# Altium PCB NanoPiAir_Shield_V1.PcbDoc (part 2 of 2)
Units mm, origin at the board's own origin, x right, y up, seen from the top; angles counter-clockwise.
Board outline 40 x 40 mm, 4 copper layers (Top Copper, Signal Layer 1, Signal Layer 2, Bottom Copper), stack 1.57 mm thick; 74 components, 57 nets, 352 pads, 255 vias.
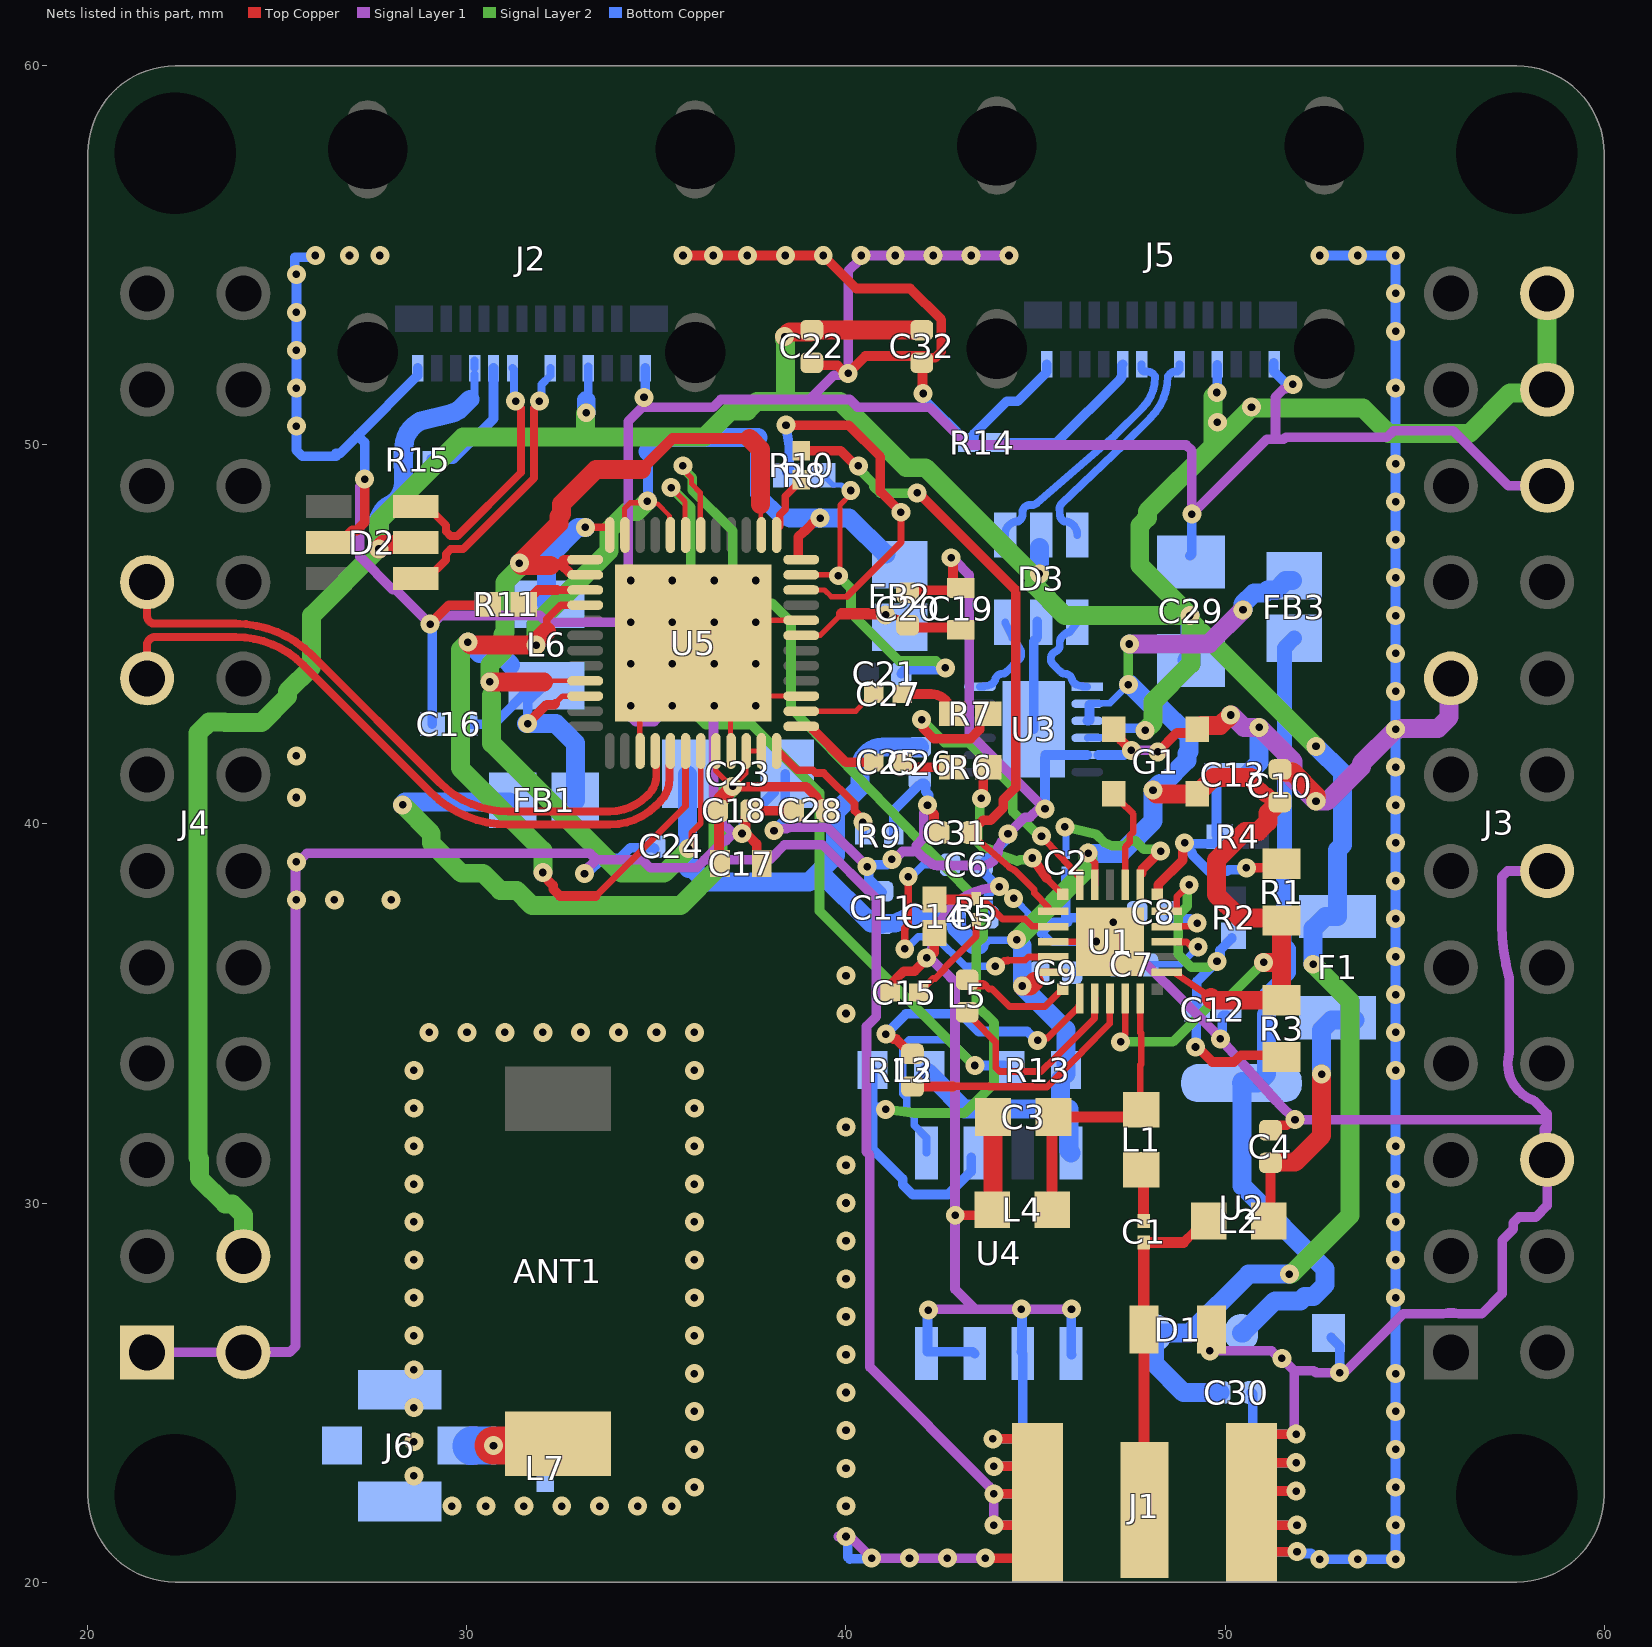
[diagram p4: the nets of this part, all layers, seen from the top]

## Via types
v1: diameter 0.5, hole 0.2, Top Copper to Bottom Copper, tented both sides, 239 vias
v2: diameter 0.5, hole 0.2, Top Copper to Bottom Copper, 16 vias

## Nets (pads, with @x,y where several pads share a name; then routed paths per layer and width w, separated by ;. In a path a pad name is that pad's centre, name@x,y a point inside that pad or via, vN(x,y) a via of type N, cw(c..) or ccw(c..) an arc to the next point about the centre after c; other vN are vias at no path point) (continued)
GND: C2.2 C3.1 C4.1 C5.1 C6.1 C7.1 C8.1 C9.2 C10.1 C11.2 C12.1 C13.2 C14.1 C15.2 C16.1 C17.1 C18.1 C19.1 C20.1 C22.1 C23.1 C24.1 C26.2 C28.2 C29.1 C30.1 C31.1 C32.1 D1.2 D2.2 D3.2 G1.1 G1.2 J1.2_1 J1.2_2 J1.3_1 J1.3_2 J2.A1 J2.A12 J3.6 J3.12 J3.15 J3.20 J4.1 J4.2 J5.A1 J5.A12 J6.2 J6.3 J6.4 L4.1 L7.1 R9.1 R11.2 R14.2 U1.16 U1.25 U2.1 U3.5 U3.13 U4.1 U4.2 U4.3 U4.4 U5.3 U5.8 U5.39 U5.45 U5.49 | length 364
  Top Copper w0.12: U5.49@34.55,42.8 U5.49@34.554,42.8
  Top Copper w0.14: U5.39@34.554,41.925 U5.49@34.554,42.8 ; U5.45@36.954,41.925 36.954,42.779 U5.49@36.975,42.8 ; U5.49@37.6,43.15 37.825,43.375 U5.3@38.804,43.375 ; U5.49@37.604,45.325 37.652,45.373 U5.8@38.825,45.373
  Top Copper w0.18: U1.16@45.466,36.894 U1.25@46.606,36.894 ; v1(46.6,36.9) U1.25@46.606,36.894 ; U1.25@46.966,36.894 U1.25@46.606,36.894
  Top Copper w0.254: D2.2@26.35,47.425 26.65,47.425 26.97,47.745 27.087,47.745 27.3,47.958 v1(27.3,49.1) ; v1(29.025,45.275) 29.525,45.775 R11.2@30.525,45.775 ; U5.49@34.304,43.125 U5.49@34.55,42.879 ; v1(35.7,55) v1(36.5,55) v1(37.4,55) v1(38.4,55) v1(39.4,55) 40.271,54.129 41.692,54.129 42.516,53.306 42.516,52.462 42.357,52.303 42.133,52.303 C32.1@42,52.17 ; U5.49@36.504,43.125 36.657,43.125 U5.49@36.95,42.832 ; C18.1@37.469,40.3 37.347,40.178 37.347,39.908 37.255,39.817 v1(37.255,39.75) 37.302,39.703 37.417,39.703 37.642,39.478 37.642,39.058 C17.1@37.7,39 ; C18.1@37.483,40.353 38.597,40.353 C28.2@38.6,40.35 ; C22.1@39.091,52.121 39.111,52.1 39.781,52.1 39.989,51.892 v1(40.056,51.892) 40.51,52.347 C32.1@42.108,52.347 ; C15.2@41.125,35.7 41.325,35.9 41.325,35.916 41.525,36.116 41.809,36.116 42.13,36.437 v1(42.13,36.466) ; C20.1@41.625,46.105 41.685,46.165 C19.1@42.94,46.165 ; C32.1@41.986,52.121 42.019,52.088 42.019,51.377 v1(42.037,51.359) ; v1(42.15,40.5) 42.15,40.433 42.323,40.26 42.323,39.877 C31.1@42.425,39.775 ; v1@42.325,36.605 C14.1@42.325,37.075 ; v1(42.775,47.025) 42.822,46.978 42.822,46.358 42.88,46.3 C19.1@42.95,46.3 ; v1(42.883,29.676) 43.712,29.676 L4.1@43.86,29.825 ; v1(43.675,20.629) 44.629,20.629 J1.2_1@44.7,20.7 ; v1(43.875,23.775) 44.7,23.775 J1.2_1@44.725,23.8 ; v1(43.9,21.5) 44.575,21.5 J1.2_1@44.65,21.575 ; v1(43.9,22.325) J1.2_1@44.55,22.325 ; v1(43.9,23.05) J1.2_1@44.55,23.05 ; G1.2@47.067,42.497 47.25,42.314 47.25,42.213 47.522,41.941 v1(47.529,41.941) ; v1(48.225,41.902) 48.725,42.402 49.172,42.402 G1.1@49.267,42.497 ; v1(49.6,26.1) 49.6,26.485 D1.2@49.67,26.555 ; J1.3_1@51.125,22.375 51.15,22.4 v1(51.875,22.4) ; J1.3_1@51.125,23.125 51.15,23.15 v1(51.875,23.15) ; J1.3_1@51.125,23.875 51.15,23.9 v1(51.875,23.9) ; J1.3_1@51.175,20.85 51.225,20.8 v1(51.9,20.8) ; J1.3_1@51.2,21.5 v1(51.9,21.5) ; C4.1@51.225,31.878 51.225,31.906 51.372,32.052 51.633,32.052 ; v1@53.469,20.535 v1@53.5,20.504
  Top Copper w0.5: L4.1@43.875,29.875 C3.1@43.875,32.264 ; G1.1@49.375,42.6 49.875,42.6 v1(50.15,42.875) ; C10.1@51.525,41.375 51.781,41.375 52.4,40.756 v1(52.4,40.6)
  Signal Layer 1 w0.254: J4.1@21.825,26.1 21.865,26.06 J4.2@24.1,26.06 ; J4.2@24.109,26.069 25.326,26.069 25.475,26.218 v1@25.475,39 ; v1(25.5,39) 25.547,39 25.772,39.225 33.251,39.225 33.4,39.076 33.4,39.055 ; v1@27.275,49.1 27.275,49.008 27.173,48.906 27.173,47.052 28.038,46.187 28.113,46.187 v1@29.012,45.288 ; v1@29.025,45.3 29.117,45.3 29.317,45.5 31.921,45.5 32.096,45.325 v2@34.3,45.325 ; v1(33.1,38.689) 33.1,38.755 33.4,39.055 ; v2@34.3,43.1 34.351,43.049 34.351,42.797 34.449,42.7 34.937,42.7 35.362,43.125 35.404,43.125 v2@35.404,44.196 ; v2@34.304,44.404 34.304,46.425 34.257,46.472 34.257,50.631 34.63,51.003 ; v2@34.4,45.325 v2@35.4,45.325 ; 34.646,51.003 34.63,51.003 ; 34.671,51 36.5,51 36.7,51.2 39.04,51.2 ; v1(34.671,51.257) 34.671,51.044 34.63,51.003 ; v2@35.404,44.225 35.404,46.311 v2@35.493,46.4 ; v2@35.45,45.325 v2@36.504,45.325 ; v2@36.504,43.125 36.504,40.271 v1@37.025,39.75 ; v2@36.504,45.354 36.504,46.425 v2@37.6,46.425 ; v1(37.255,39.75) v1@37.025,39.75 ; v2@37.575,44.225 36.504,44.225 v2@36.504,45.325 ; v2@37.6,45.325 v2@36.504,45.325 ; v2@37.604,43.125 v2@37.604,44.196 ; v1(38.1,39.825) 38.147,39.872 38.438,39.872 38.477,39.912 39.513,39.912 40.55,38.875 v1(40.557,38.875) ; v1@39.8,21.2 v1(40,21.2) 40.104,21.2 v1(40.675,20.629) v1(41.675,20.629) ; v1@40.367,54.9 40.056,54.589 v1(40.056,51.892) 40.009,51.845 39.685,51.845 39.04,51.2 ; v1(40.4,55) v1(41.3,55) v1(42.3,55) v1@43.2,55 ; v1(41.212,39.065) 41.279,39.065 41.488,39.275 41.775,39.275 ; v1@41.729,20.629 v1(42.675,20.629) ; 41.856,39.292 42.005,39.143 42.222,38.986 ccw(c42.409,39.158) 42.408,38.904 43.579,38.904 ccw(c43.579,39.35) 44.025,39.35 cw(c44.025,39.375) 44,39.375 44.055,39.439 44.096,39.53 ; 41.859,39.434 42.05,39.625 42.05,40.301 42.103,40.354 42.103,40.453 v1(42.15,40.5) ; v1(42.13,36.466) 42.187,36.466 42.197,36.477 42.4,37.225 cw(c44.025,36.575) v1@44.025,38.325 ; v1(42.175,27.175) 42.2,27.2 43.4,27.2 ; v1@42.226,36.45 42.532,36.144 42.566,36.144 42.875,35.834 42.875,35.075 ; v1@42.771,20.629 v1(43.675,20.629) ; v1(42.775,47.025) 42.85,46.95 42.875,46.95 43.25,46.575 43.25,42.4 v1@45.148,40.502 ; v1@42.875,29.668 42.875,27.725 43.4,27.2 ; v1@42.875,29.7 42.875,35.067 ; 43.2,50 42.2,51 40.3,51 40.1,51.2 39.04,51.2 ; 43.233,50 48.976,50 49.125,49.851 v1(49.125,48.175) 51.103,50.153 51.333,50.153 ; v1(43.3,55) v1@44.2,55 ; v1(43.9,21.5) v1(43.9,22.325) 43.9,22.4 43.892,22.4 43.777,22.515 43.777,22.523 40.631,25.669 40.631,31.261 40.543,31.35 40.543,34.662 40.8,34.919 40.8,38.025 39.373,39.452 38.377,39.452 37.98,39.055 36.268,39.055 ; v1(44.275,39.738) 44.279,39.738 44.723,40.181 44.855,40.181 v1@45.103,40.429 ; v1(45.95,27.2) v1(44.625,27.2) 43.4,27.2 ; v1(47.056,37.411) 47.103,37.364 47.103,37.122 v1@49.719,34.506 ; v1(47.529,41.941) 47.533,41.946 48.181,41.946 v1(48.225,41.902) ; v1(49.6,26.1) 51.233,26.1 51.433,25.9 v1(51.5,25.9) 51.825,25.575 ; v1(49.878,34.329) 51.355,32.692 51.429,32.618 v1(51.847,32.2) ; v1(51.791,51.602) 51.724,51.602 51.608,51.486 51.558,51.486 51.333,51.261 51.333,50.153 ; v1(51.875,23.9) 51.828,23.947 51.828,24.097 51.825,24.1 51.825,25.575 ; v1@51.9,32.2 58.5,32.2 ; J3.6@58.425,31.215 58.425,31.954 ; J3.6@58.5,31.14 58.5,29.929 58.203,29.632 57.758,29.632 57.609,29.483 57.609,29.309 57.313,29.013 57.313,27.613 56.774,27.074 56.211,27.074 cw(c56.213,27.328) 56.168,27.078 56.166,27.079 ccw(c55.96,26.06) 55.755,27.079 cw(c55.707,27.328) 55.708,27.074 54.699,27.074 53.15,25.525 v1(53.025,25.525) 52.393,25.525 52.343,25.575 51.825,25.575 ; 58.5,31.954 58.5,32.2 ; J3.12@58.5,38.76 57.454,38.76 57.305,38.611 57.305,37.34 ccw(c62.445,37.34) 57.5,35.936 57.5,33.964 ccw(c58.5,33.68) 57.5,33.396 ccw(c57.75,33.44) 57.514,33.347 57.534,33.296 ccw(c58.5,33.68) 58.15,32.701 58.5,32.351 58.5,32.2 ; J3.20@58.5,48.92 57.48,48.92 56.025,50.375 54.443,50.375 54.268,50.2 51.6,50.2 51.553,50.153 51.333,50.153 ; 33.4,39.055 34.625,39.055 34.834,38.846 36.059,38.846 36.268,39.055 ; 36.268,39.055 36.776,39.563 36.838,39.563 v1@37.025,39.75
  Signal Layer 1 w0.5: v1(50.15,42.875) 50.175,42.875 50.5,42.55 v1(50.9,42.55) 51.8,41.65 51.8,41.2 v1(52.4,40.6) 52.693,40.6 53.596,41.504 53.596,41.596 v1(54.5,42.5) 54.62,42.5 54.645,42.525 55.621,42.525 55.914,42.818 55.914,43.794 J3.15@55.96,43.84
  Bottom Copper w0.18: v1@44.375,37.95 44.511,37.95 44.803,37.658 44.803,37.522 45.175,37.15 45.45,36.875 46.575,36.875 v1(46.6,36.9) 46.6,36.851 47.125,36.326 C7.1@47.125,36.275 ; C9.2@45.965,36.075 46.904,36.075 C7.1@47.05,36.221
  Bottom Copper w0.254: v1@25.5,50.494 25.5,49.858 25.65,49.708 26.543,49.708 ; v1(25.5,50.5) v1@25.5,51.487 ; v1(25.5,51.5) v1@25.5,52.453 ; v1(25.5,52.5) v1@25.5,53.491 ; v1(25.5,53.5) v1@25.5,54.485 ; v1(25.5,54.5) 25.453,54.547 25.453,54.944 25.462,54.953 25.921,54.953 v1@25.984,55.016 ; 26.543,49.784 26.616,49.784 26.635,49.765 27.119,50.249 ; v1(27.3,49.1) 27.3,50.068 27.119,50.249 ; J2.A1@28.7,52.03 28.7,51.83 27.119,50.249 ; v1(29.025,45.275) 29.088,45.212 C16.1@29.088,42.632 ; v1(33.1,38.689) 33.167,38.689 33.573,39.095 34.03,39.095 34.313,39.378 34.922,39.378 C24.1@34.95,39.35 ; v1(34.671,51.257) 34.7,51.286 J2.A12@34.7,52.03 ; v1(37.255,39.75) 37.297,39.792 37.297,40.029 38.1,40.832 C23.1@38.1,40.85 ; v1(38.1,39.825) 38.394,40.119 C23.1@38.394,41.326 ; v1(40,21.2) 40.047,21.153 40.047,20.653 40.1,20.6 40.115,20.615 40.685,20.615 v1@40.7,20.6 ; v1@40.568,38.875 40.615,38.922 41.081,38.922 41.212,39.054 v1(41.212,39.065) ; v1@40.604,38.828 40.604,38.546 C11.2@40.95,38.2 ; R9.1@41.257,39.696 41.257,40.357 C26.2@41.925,41.025 ; C26.2@42,41.075 42.062,41.075 42.108,41.028 42.108,40.847 42.183,40.773 42.183,40.533 v1(42.15,40.5) ; v1(42.037,51.359) 42.037,51.224 43.2,50.061 R14.2@43.225,50.061 ; U4.4@42.15,26.075 43.344,26.075 U4.3@43.394,26.025 ; U4.4@42.15,26.1 42.15,27.15 v1(42.175,27.175) ; R14.2@43.278,50.089 43.373,50.184 43.373,50.289 44.238,51.154 44.524,51.154 45.3,51.93 J5.A1@45.3,52.13 ; C6.1@43.65,38.9 43.65,38.7 v1@44.002,38.348 ; C6.1@43.65,39 44.228,39.578 44.228,39.691 v1(44.275,39.738) ; C5.1@43.75,37.55 43.75,38.05 cw(c44.025,38.05) v1@44.025,38.325 ; v1(43.875,23.775) 44.502,23.775 J1.2_2@44.55,23.727 ; v1(43.9,21.5) 44.55,21.5 J1.2_2@44.575,21.475 ; v1(43.9,22.325) J1.2_2@44.375,22.325 ; v1(43.9,23.05) J1.2_2@44.475,23.05 ; U4.2@44.625,26.075 44.645,26.095 44.645,27.18 v1(44.625,27.2) ; J1.2_2@44.664,23.7 U4.2@44.664,26.025 ; U3.13@44.95,42.496 44.95,44.825 45.05,44.925 D3.2@45.05,45.35 ; 45.15,37.125 45.175,37.15 45.436,37.411 45.85,37.411 ; v1(45.25,40.4) U3.13@45.25,41.75 ; U3.13@45.254,41.821 U3.5@46.366,41.821 ; 45.801,38.7 45.801,37.574 45.85,37.525 46.775,37.525 v1@46.842,37.458 ; U4.1@45.95,26 45.942,26.008 45.942,27.192 v1(45.95,27.2) ; U3.5@46.658,41.821 47.341,41.821 47.462,41.941 v1(47.529,41.941) ; v1@47.215,37.503 47.553,37.503 C8.1@47.675,37.625 ; C29.1@49.075,47.075 49.125,47.125 v1(49.125,48.175) ; v1@49.925,34.376 v1(49.878,34.329) 49.878,34.395 49.93,34.448 49.93,34.921 49.959,34.95 C12.1@50.05,34.95 ; J1.3_2@50.65,23.302 J1.3_2@50.73,23.382 ; J1.3_2@50.7,22.1 50.73,22.13 J1.3_2@50.73,23.382 ; C30.1@50.7,25 50.73,24.97 J1.3_2@50.73,23.382 ; J1.3_2@51.075,20.975 51.075,20.973 51.248,20.8 v1(51.9,20.8) 51.947,20.753 52.281,20.753 52.433,20.6 v1(52.5,20.6) 52.502,20.602 v1@53.498,20.602 ; J1.3_2@51.1,23.2 51.15,23.15 v1(51.875,23.15) ; J1.3_2@51.125,22.4 v1(51.875,22.4) ; J1.3_2@51.15,21.675 51.15,21.598 51.248,21.5 v1(51.9,21.5) ; J5.A12@51.283,52.172 51.283,51.947 51.581,51.649 51.744,51.649 v1(51.791,51.602) ; v1(51.875,23.9) 51.248,23.9 J1.3_2@50.73,23.382 ; v1(52.5,55) v1(53.5,55) v1(54.5,55) v1(54.5,54) v1(54.5,53) v1(54.5,51.5) v1(54.5,49.5) v1(54.5,48.5) v1(54.5,47.5) v1(54.5,46.5) v1(54.5,45.5) ; U2.1@52.8,26.45 53.025,26.225 v1(53.025,25.525) ; v1(53.5,20.604) 53.502,20.602 54.498,20.602 v1(54.5,20.6) v1(54.5,21.5) v1(54.5,22.5) v1(54.5,23.5) v1(54.5,24.5) v1(54.5,25.5) v1(54.5,27.5) v1(54.5,28.5) v1(54.5,29.5) v1(54.5,30.5) v1(54.5,31.5) v1(54.5,33.5) v1(54.5,34.5) v1(54.5,35.5) v1(54.5,36.5) v1@54.5,37.4 ; v1(54.5,37.5) v1(54.5,38.5) v1(54.5,39.5) v1(54.5,40.5) v1(54.5,41.5) v1(54.5,42.5) v1(54.5,43.5) v1(54.5,44.5) v1@54.5,45.4
  Bottom Copper w0.5: C13.2@50.6,41.325 50.68,41.325 50.711,41.356 50.711,41.436 50.9,41.625 v1(50.9,42.55)
  other v1: 29.6,22 30.5,22 31.5,22 32.5,22 33.5,22 34.5,22 35.4,22 40,22 36,22.5 28.6,22.8 40,23 36,23.5 28.6,23.7 40,24 36,24.5 28.6,24.6 40,25 36,25.5 28.6,25.6 40,26 28.6,26.5 36,26.5 40,27 28.6,27.5 36,27.5 40,28 28.6,28.5 36,28.5 40,29 28.6,29.5 36,29.5 40,30 28.6,30.5 36,30.5 40,31 28.6,31.5 36,31.5 40,32 28.6,32.5 36,32.5 28.6,33.5 36,33.5 29,34.5 30,34.5 31,34.5 32,34.5 33,34.5 34,34.5 35,34.5 36,34.5 40,35 40,36 25.5,38 26.5,38 28,38 44.425,38.036 44.045,38.348 25.5,40.7 25.5,41.8 26,55 26.9,55 27.7,55 44.3,55
  other v2: 34.319,43.125 35.419,43.125 36.519,43.125 37.619,43.125 34.319,44.225 35.419,44.225 36.519,44.225 37.619,44.225 34.319,45.325 35.419,45.325 36.519,45.325 37.619,45.325 34.319,46.425 35.419,46.425 36.519,46.425 37.619,46.425
IF_AGC: C31.2 R10.2 U1.14 | length 17.1
  Top Copper w0.18: C31.2@43.45,39.603 44.304,38.864 ccw(c44.421,39.001) 44.34,38.841 44.414,38.803 cw(c44.333,38.642) 44.46,38.77 44.968,38.261 44.968,38.176 45.335,37.81
  Top Copper w0.254: R10.2@38.875,49.767 38.875,49.791 38.928,49.844 39.864,49.844 40.258,49.45 v1(40.325,49.45) ; v1(41.875,48.738) 41.912,48.738 44.475,46.175 44.475,40.964 44.153,40.642 44.153,40.437 43.813,40.097 43.608,40.097 43.316,39.805 C31.2@43.316,39.775 ; C31.2@43.303,39.75 43.443,39.61 C31.2@43.45,39.603
  Signal Layer 2 w0.254: v1(40.325,49.45) 40.325,49.383 40.731,48.977 40.731,48.906 40.909,48.729 41.866,48.729 v1(41.875,48.738)
IF_N: R7.1 U1.12 | length 9
  Top Copper w0.18: v1(45.159,39.681) 46.166,38.598 U1.12@46.166,38.394
  Top Copper w0.254: v1(41.996,42.753) 42.043,42.706 42.043,42.518 42.313,42.249 43.286,42.249 43.527,42.489 43.527,42.706 43.72,42.9 R7.1@43.775,42.9
  Signal Layer 2 w0.254: v1(41.996,42.753) 42.599,42.15 43.225,42.15 44.4,40.975 44.4,40.325 44.638,40.087 44.686,40.087 45.093,39.681 v1(45.159,39.681)
IF_P: R6.1 U1.13 | length 5.1
  Top Copper w0.18: 45.275,38.55 45.309,38.55 U1.13@45.716,38.144
  Top Copper w0.254: v1(43.573,40.677) 43.62,40.724 43.62,41.302 43.547,41.302 43.72,41.475 R6.1@43.775,41.475 ; v1(44.915,39.103) 45.292,38.567
  Signal Layer 2 w0.254: v1(43.573,40.677) 43.526,40.63 43.526,40.055 43.475,40.004 43.475,39.52 43.59,39.405 43.922,39.287 43.953,39.222 44.519,39.02 44.585,39.052 44.59,39.056 44.868,39.056 v1(44.915,39.103)
NetANT1_1: ANT1.1 J6.1 L7.2 | length 3.2
  Top Copper w1: v1(30.7,23.6) ANT1.1@32.1,23.6
  Bottom Copper w0.2: v1(30.7,23.6) 31.8,23.6 L7.2@31.9,23.5
  Bottom Copper w1: J6.1@30.112,23.588 30.125,23.6 v1(30.7,23.6)
NetC1_2: C1.2 L1.1 | length 1.4
  Top Copper w0.254: L1.1@47.789,30.88 L1.1@47.85,30.819
  Top Copper w0.293: C1.2@47.85,29.525 L1.1@47.85,30.819
NetC2_1: C2.1 U1.8 | length 4.3
  Top Copper w0.254: U1.8@47.8,38.7 47.8,38.781 v1(48.302,39.283)
  Signal Layer 2 w0.254: v1(45.775,39.925) 46.599,39.733 46.828,39.505 47.013,39.425 47.342,39.425 47.467,39.55 47.644,39.55 47.864,39.33 48.255,39.33 v1(48.302,39.283)
  Bottom Copper w0.18: C2.1@45.801,39.225 v1@45.801,39.899
NetC3_2: C3.2 L1.2 L4.2 U1.24 | length 7.8
  Top Copper w0.18: L1.2@47.766,32.484 47.766,33.645 47.792,33.671 47.792,34.477 47.766,34.502 U1.24@47.766,35.394
  Top Copper w0.254: C3.2@45.44,32.229 C3.2@45.475,32.264 ; L1.2@47.593,32.264 L1.2@47.789,32.46 L1.2@47.766,32.484
  Top Copper w0.293: L4.2@45.44,29.825 C3.2@45.44,32.229 ; C3.2@45.475,32.264 L1.2@47.593,32.264
NetC4_2: C4.2 F1.2 L2.1 | length 6.9
  Top Copper w0.254: L2.1@51.126,29.6 51.2,29.673 C4.2@51.2,31.059
  Top Copper w0.5: C4.2@51.2,31.059 51.22,31.079 51.853,31.079 52.55,31.776 v1(52.55,33.4)
  Bottom Copper w0.5: v1(52.55,33.4) 52.55,34.57 52.805,34.825 F1.2@53.425,34.825
NetC6_2: C6.2 U1.17 | length 7.4
  Top Copper w0.18: 44.27,36.407 44.725,36.407 44.812,36.494 U1.17@45.169,36.494
  Top Copper w0.2: v1(41.549,36.704) 41.55,37.254 41.643,37.347 v1(41.643,38.61) ; v1(43.939,36.247) 44.02,36.247 44.17,36.397 44.26,36.397 44.27,36.407
  Bottom Copper w0.2: v1(41.549,36.704) 41.585,36.704 41.911,37.03 42.361,37.03 43.145,36.247 v1(43.939,36.247) ; v1(41.643,38.61) 41.724,38.61 42.039,38.925 42.725,38.925 C6.2@42.75,38.95
NetC7_2: C7.2 U1.4 | length 2.1
  Top Copper w0.18: U1.4@48.725,36.9 48.738,36.887 48.987,36.887 49.057,36.817 49.228,36.817 v1(49.289,36.756)
  Bottom Copper w0.18: C7.2@48.025,36.3 48.833,36.3 v1(49.289,36.756)
NetC8_2: C8.2 U1.5 | length 1.7
  Top Copper w0.18: U1.5@48.466,37.294 48.473,37.3 49.098,37.3 49.18,37.383 v1(49.267,37.383)
  Bottom Copper w0.254: C8.2@48.525,37.66 48.682,37.503 49.079,37.503 49.2,37.383 v1(49.267,37.383)
NetC14_2: C14.2 R5.2 U1.15 | length 3.3
  Top Copper w0.18: R5.2@43.525,37.975 43.557,37.943 43.683,37.943 44.133,37.493 44.725,37.493 44.918,37.3 45.459,37.3 U1.15@45.466,37.294
  Top Copper w0.254: C14.2@42.332,38.007 R5.2@43.407,38.007
NetC15_1: C15.1 R5.1 | length 2.5
  Top Copper w0.18: C15.1@41.92,35.55 41.941,35.55 42.087,35.696 42.087,35.718 42.293,35.923 42.355,35.923 42.603,36.172 42.603,36.201 43.433,37.03 43.433,37.39 43.425,37.398 R5.1@43.425,37.4
NetC21_1: C21.1 R8.2 U5.11 | length 9.2
  Top Copper w0.14: U5.11@39.25,46.575 39.775,46.575 v1(39.8,46.55) 39.839,46.589 39.839,48.414 40.125,48.7 v1(40.125,48.8)
  Signal Layer 2 w0.254: v1(39.8,46.55) 40.132,46.218 40.132,45.568 41.398,44.301 42.373,44.301 42.555,44.12 v1(42.621,44.12)
  Bottom Copper w0.14: R8.2@39.5,49.15 39.5,49.101 39.656,48.945 39.883,48.945 40.028,48.8 v1(40.125,48.8)
  Bottom Copper w0.254: C21.1@41.455,43.965 41.563,44.073 42.574,44.073 v1(42.621,44.12)
NetC25_1: C25.1 R6.2 | length 1.3
  Top Copper w0.254: C25.1@41.475,41.55 41.585,41.55 41.635,41.5 R6.2@42.8,41.5
NetC25_2: C25.2 U5.1 | length 2
  Top Copper w0.254: U5.1@39.125,42.5 39.999,41.626 C25.2@40.73,41.626
NetC27_1: C27.1 R7.2 | length 4.1
  Top Copper w0.254: C27.1@41.488,43.43 42.245,43.43 ; 42.245,43.43 cw(c42.245,42.9) R7.2@42.775,42.9 ; 42.245,43.43 cw(c42.245,42.9) R7.2@42.775,42.9 ; 42.245,43.43 cw(c42.245,42.9) R7.2@42.775,42.9 ; 42.245,43.43 cw(c42.245,42.9) R7.2@42.775,42.9
NetC27_2: C27.2 U5.2 | length 2.1
  Top Copper w0.14: U5.2@38.85,42.975 40.254,42.975 40.709,43.43 C27.2@40.73,43.43
NetFB3_2: FB3.2 U2.2 U2.4 | length 21.7
  Bottom Copper w0.4: 51.1,34.968 51.1,35.508 51.672,36.079 51.672,36.699 51.551,36.82 51.551,39.156 51.567,39.173 51.567,44.642 FB3.2@51.825,44.899
  Bottom Copper w0.5: U2.2@50.436,26.574 50.47,26.574 51.315,27.418 51.991,27.418 52.102,27.529 52.329,27.529 52.643,27.843 52.643,28.257 50.45,30.45 U2.4@50.45,33.2 ; U2.4@50.436,33.164 50.862,33.164 51.1,33.402 51.1,34.968
NetG1_3: G1.3 U1.9 | length 2.5
  Top Copper w0.18: G1.3@47.214,40.625 47.58,40.26 47.58,39.784 47.486,39.69 47.486,39.509 47.366,39.388 U1.9@47.366,38.394
NetJ2_A5: J2.A5 R15.2 | length 3.4
  Bottom Copper w0.254: R15.2@29.058,49.632 29.642,49.632 30.7,50.69 J2.A5@30.7,52.03
NetJ5_A5: J5.A5 R14.1 | length 4.3
  Bottom Copper w0.254: R14.1@44.044,50.038 44.066,50.061 45.557,50.061 47.242,51.745 47.242,51.758 47.277,51.794 47.277,52.107 J5.A5@47.3,52.13
NetL3_1: L3.1 U1.22 | length 6.6
  Top Copper w0.18: 44.9,33.057 45.3,33.057 46.229,33.986 46.229,34.001 46.959,34.73 46.959,35.387 U1.22@46.966,35.394
  Top Copper w0.2: 42.824,33.075 43.78,33.075 43.787,33.067 44.892,33.067 44.9,33.075
  Top Copper w0.254: L3.1@41.725,33.075 42.824,33.075
NetL3_2: L3.2 U1.20 | length 6.9
  Top Copper w0.18: v1(45.054,34.292) 45.115,34.353 45.322,34.353 46.15,35.182 U1.20@46.15,35.225
  Top Copper w0.254: v1(41.051,34.457) 41.117,34.457 41.247,34.328 41.323,34.328 41.717,33.934 L3.2@41.756,33.934
  Bottom Copper w0.254: v1(41.051,34.457) 41.583,34.99 43.035,34.99 43.5,34.525 44.782,34.525 45.015,34.292 v1(45.054,34.292)
NetL5_1: L5.1 U1.21 | length 5.5
  Top Copper w0.18: L5.1@43.2,35 43.231,35 43.374,34.857 43.374,34.826 43.95,34.25 43.95,33.574 44.055,33.468 45.143,33.468 45.325,33.65 45.337,33.65 46.559,34.872 46.559,35.387 U1.21@46.566,35.394
NetL5_2: L5.2 U1.19 | length 3
  Top Copper w0.18: 43.65,35.775 43.775,35.65 43.85,35.65 44.318,35.182 45.254,35.182 U1.19@45.716,35.644
  Top Copper w0.254: L5.2@43.196,35.893 43.33,35.76 43.605,35.76
NetL6_1: L6.1 U5.24 | length 3.2
  Top Copper w0.12: U5.24@33.7,47.825 U5.24@33.725,47.85
  Top Copper w0.2: v1(33.125,47.825) U5.24@33.7,47.825
  Bottom Copper w0.5: L6.1@32.1,45.801 32.1,47 32.925,47.825 v1(33.125,47.825)
NetR8_1: R8.1 U5.10 | length 9.9
  Top Copper w0.14: U5.10@38.804,46.175 39.435,46.175 39.61,46 40,46
  Top Copper w0.18: 40.025,46.007 41.45,47.432 41.45,48.175 v1@41.425,48.2
  Top Copper w0.254: v1(38.416,50.523) 38.418,50.525 40.07,50.525 40.905,49.69 40.905,48.77 v1(41.45,48.225)
  Bottom Copper w0.254: v1(38.416,50.523) 38.503,49.975 38.503,49.335 R8.1@38.443,49.275
NetR9_2: R9.2 U5.48 | length 3.5
  Top Copper w0.2: U5.48@38.182,41.943 38.709,41.416 39.125,41.416 39.197,41.345 39.41,41.345 40.225,40.53 40.225,40.525 ; 40.225,40.45 40.225,40.35 40.447,40.129 v1(40.447,40.047)
  Bottom Copper w0.2: v1(40.447,40.047) 40.453,39.996 R9.2@40.453,39.697
NetR10_1: R10.1 U5.13 | length 1.6
  Top Copper w0.2: U5.13@38.2,47.8 38.254,47.854 38.254,48.154 38.4,48.3 38.4,48.646 38.819,49.066 R10.1@38.819,49.087 ; R10.1@38.709,49.009 R10.1@38.75,49.05
NetR11_1: R11.1 U5.27 | length 1.7
  Top Copper w0.14: U5.27@33.073,46.173 U5.27@33.075,46.175
  Top Copper w0.2: 32.373,46.173 U5.27@33.073,46.173
  Top Copper w0.254: R11.1@31.5,45.8 31.525,45.8 31.723,45.998 31.723,46.023 31.873,46.173 32.373,46.173
NetR12_2: R12.2 U4.6 U5.18 | length 31.1
  Top Copper w0.14: v1(35.697,49.453) 35.697,49.355 35.924,49.129 35.924,48.976 36.152,48.748 36.152,48.026 U5.18@36.151,48.026
  Signal Layer 2 w0.254: v1(35.697,49.453) 35.697,49.386 35.943,49.14 35.943,48.804 37.008,47.738 37.008,46.648 37.115,46.542 37.115,46.216 37.41,45.921 37.579,45.921 37.671,45.829 38.046,45.829 38.55,45.325 38.55,43.056 43.622,37.822 43.622,37.02 43.435,36.833 43.435,35.228 43.904,34.759 43.904,33.154 43.125,32.375 41.805,32.375 v1(41.047,32.472)
  Bottom Copper w0.254: R12.2@40.7,33.504 40.7,31.428 41.494,30.634 41.494,30.488 41.757,30.225 42.694,30.225 43.3,30.831 U4.6@43.3,31.2 ; 40.75,32.525 40.756,32.519 40.999,32.519 v1(41.047,32.472)
NetR13_2: R13.2 U4.5 U5.19 | length 26.6
  Top Copper w0.14: v1(35.387,48.875) 35.75,48.512 U5.19@35.75,48.05
  Signal Layer 2 w0.254: v1(35.387,48.875) 35.908,48.353 35.908,46.648 35.923,46.634 35.923,46.216 35.908,46.202 35.908,45.548 35.923,45.534 35.923,45.116 35.908,45.102 35.908,44.448 35.923,44.434 35.923,44.016 35.908,44.002 35.908,43.292 36,43.2 36,42.916 36.295,42.621 37.504,42.621 39.3,40.825 39.3,37.703 43.375,33.628 v1(43.4,33.628)
  Bottom Copper w0.2: U4.5@42.124,31.325 42.124,31.725 41.8,32.049 41.8,32.275 41.6,32.475 41.6,32.775 41.497,32.879 41.497,34.13 41.674,34.307 42.725,34.307 43.4,33.633 v1(43.4,33.628)
  Bottom Copper w0.254: v1(43.4,33.628) 44.18,33.628 R13.2@44.304,33.504
RF1: C1.1 D1.1 J1.1 L2.2 | length 9
  Top Copper w0.254: C1.1@47.85,28.961 C1.1@47.855,28.956 ; D1.1@47.855,26.664 D1.1@47.86,26.659 ; J1.1@47.86,21.915 J1.1@47.875,21.9 ; 48.908,28.961 49.189,29.242 49.204,29.242 49.547,29.585 L2.2@49.547,29.6
  Top Copper w0.293: C1.1@47.85,28.961 48.908,28.961 ; D1.1@47.855,26.664 C1.1@47.855,28.956 ; J1.1@47.86,21.915 D1.1@47.86,26.659
RTL_SDR_USB_D_N: J4.15 U5.41 | length 17.9
  Top Copper w0.21: J4.15@21.56,43.84 21.56,44.725 cw(c21.77,44.725) 21.621,44.874 cw(c21.77,44.725) 21.77,44.935 23.888,44.935 cw(c23.888,42.395) 25.684,44.191 29.044,40.832 ccw(c31.087,42.875) 31.087,39.985 33.766,39.985 ccw(c33.766,41.723) 34.994,40.494 35.097,40.597 ccw(c34.503,41.191) 35.343,41.191 35.343,41.521 cw(c35.386,41.521) 35.356,41.552 ccw(c35.326,41.582) 35.369,41.582 U5.41@35.369,41.925
RTL_SDR_USB_D_P: J4.17 U5.40 | length 17.4
  Top Copper w0.21: J4.17@21.56,46.38 21.56,45.495 ccw(c21.77,45.495) 21.621,45.346 ccw(c21.77,45.495) 21.77,45.285 23.888,45.285 cw(c23.888,42.395) 25.932,44.439 29.291,41.079 ccw(c31.087,42.875) 31.087,40.335 33.766,40.335 ccw(c33.766,41.723) 34.747,40.742 34.799,40.793 ccw(c34.328,41.264) 34.994,41.264 34.994,41.521 ccw(c34.951,41.521) 34.981,41.552 cw(c35.011,41.582) 34.969,41.582 U5.40@34.969,41.925
SCL: C12.2 R2.2 R3.2 U1.6 | length 9.8
  Top Copper w0.18: U1.6@48.466,37.694 48.715,37.694 48.725,37.704 48.725,38.075 49.045,38.395 v1(49.055,38.395)
  Top Copper w0.254: v1(49.222,34.117) 49.269,34.117 49.667,33.72 50.238,33.72 50.419,33.9 R3.2@51.4,33.9
  Signal Layer 2 w0.254: v1(49.055,38.395) 49.008,38.348 49.008,37.837 48.763,37.591 48.763,36.569 49.107,36.225 49.576,36.225 49.728,36.377 v1(49.788,36.377)
  Bottom Copper w0.254: v1(49.222,34.117) 49.241,34.136 C12.2@49.241,35.1 ; C12.2@49.25,35.225 49.259,35.234 49.259,35.848 v1(49.788,36.377) 49.788,36.444 49.869,36.524 49.869,36.669 50.175,36.975 R2.2@50.175,37
SDA: C13.1 R1.2 R4.2 U1.7 | length 7.1
  Top Copper w0.254: U1.7@48.225,38.125 48.239,38.139 48.239,38.399 48.887,39.047 48.887,39.454 v1(48.934,39.501) ; v1(50.562,38.841) 51.122,38.841 51.127,38.836 R1.2@51.127,38.76
  Bottom Copper w0.254: v1@48.85,39.475 49.625,39.475 ccw(c49.625,39.7) R4.2@49.85,39.7 ; v1(48.934,39.501) 48.934,39.434 49.133,39.235 49.133,39.192 49.565,38.76 50.058,38.76 50.092,38.794 50.515,38.794 v1(50.562,38.841) ; R4.2@49.775,39.7 49.775,41.3 C13.1@49.789,41.3
USB_1_N: D2.4 J2.A7 | length 7.4
  Top Copper w0.21: D2.4@28.65,46.475 28.95,46.475 29.444,46.969 29.444,47.127 29.567,47.25 29.896,47.25 31.77,49.124 31.77,50.978 31.908,51.116 v1(31.908,51.156)
  Bottom Copper w0.206: v1(31.908,51.156) 31.964,51.212 31.964,51.594 32.2,51.83 J2.A7@32.2,52.03
USB_1_P: D2.6 J2.A6 | length 6.7
  Top Copper w0.21: D2.6@28.65,48.375 28.95,48.375 29.444,47.881 29.444,47.723 29.567,47.6 29.751,47.6 31.42,49.269 31.42,50.978 31.281,51.116 v1(31.281,51.156)
  Bottom Copper w0.206: J2.A6@31.2,52.03 31.241,51.989 31.241,51.196 v1(31.281,51.156)
USB_2_N: D3.1 U3.1 | length 2.6
  Bottom Copper w0.206: D3.1@46.1,45.325 45.903,45.059 ccw(c45.903,44.853) 45.762,45.002 45.706,44.949 ccw(c45.848,44.8) 45.642,44.8 45.642,44.725 cw(c45.45,44.725) 45.526,44.549 ccw(c45.609,44.36) 45.462,44.215 45.656,44.021 ccw(c45.801,44.168) 45.787,43.962 cw(c45.775,43.771) 45.962,43.816 ccw(c46.161,43.867) 46.081,43.677 ccw(c46.366,44.366) U3.1@46.255,43.629 ; U3.1@46.255,43.629 U3.1@46.366,43.621
USB_2_P: D3.3 U3.12 | length 2.4
  Bottom Copper w0.206: U3.12@43.534,43.621 ccw(c43.534,44.366) 43.818,43.677 ccw(c43.739,43.867) 43.939,43.817 cw(c44.125,43.771) 44.113,43.962 ccw(c44.099,44.168) 44.244,44.021 44.566,44.344 ccw(c44.42,44.489) 44.601,44.588 44.465,44.837 ccw(c44.284,44.739) D3.3@44.398,44.911 ; D3.3@44.2,45.325 D3.3@44.397,44.911
USB_3_N: D3.6 J5.A7 | length 6.1
  Bottom Copper w0.206: D3.6@46.1,47.625 46.1,47.646 ccw(c45.764,47.646) 46.002,47.884 ccw(c45.764,47.646) 45.764,47.982 cw(c45.848,48.17) 45.642,48.169 45.642,48.225 ccw(c45.45,48.225) 45.638,48.266 cw(c45.839,48.31) 45.697,48.46 47.329,50.011 48.037,50.72 ccw(c46.941,51.816) 48.491,51.816 48.562,51.887 cw(c48.683,51.767) 48.683,51.937 48.72,51.937 ccw(c48.72,52.017) 48.777,51.96 ccw(c48.72,52.017) 48.8,52.017 J5.A7@48.8,52.13
USB_3_P: D3.4 J5.A6 | length 6.6
  Bottom Copper w0.206: D3.4@44.2,47.625 44.2,47.646 cw(c44.536,47.646) 44.298,47.884 cw(c44.536,47.646) 44.536,47.982 ccw(c44.452,48.17) 44.658,48.169 44.658,48.225 cw(c44.85,48.225) 44.85,48.417 44.906,48.417 ccw(c44.906,48.623) 45.042,48.467 47.099,50.253 47.802,50.955 ccw(c46.941,51.816) 48.158,51.816 48.105,51.869 ccw(c47.942,51.706) 47.942,51.937 47.88,51.937 cw(c47.88,52.017) 47.823,51.96 cw(c47.88,52.017) 47.8,52.017 J5.A6@47.8,52.13
VCC: C5.2 C9.1 C10.2 C11.1 C23.2 C24.2 C26.1 FB3.1 G1.4 R1.1 R3.1 R12.1 R13.1 U1.2 U1.11 U1.18 U1.23 U3.2 U3.3 U4.8 U5.14 U5.25 U5.26 U5.33 U5.43 | length 95.4
  Top Copper w0.12: 32.15,43.775 U5.33@33.104,43.775 ; U5.14@37.75,47.6 37.75,48.425
  Top Copper w0.15: v1(35.85,39.35) 35.917,39.417 35.917,39.767 36.169,40.019 U5.43@36.169,41.925
  Top Copper w0.18: 44.975,35.85 44.975,35.903 45.166,36.094 U1.18@45.466,36.094 ; v1@46.425,39.225 46.425,39.117 46.566,38.976 U1.11@46.566,38.394 ; v1@47.366,34.455 U1.23@47.366,35.143 ; U1.2@48.625,36.1 49.625,35.425
  Top Copper w0.254: 32.2,46.825 32.505,46.825 U5.26@32.7,46.63 ; 32.476,46.891 32.558,46.973 U5.25@32.756,46.973
  Top Copper w0.3: 34.602,49.352 35.422,50.172 37.457,50.172
  Top Copper w0.4: 50.682,41.225 50.747,41.161 50.747,41.085 51.067,40.765 51.116,40.765 C10.2@51.233,40.648
  Top Copper w0.5: v1(30.6,43.75) 32.025,43.75 ; 32.2,46.825 31.438,46.825 v1(31.381,46.881) 32.422,47.922 32.422,48.116 32.488,48.183 32.488,48.438 33.402,49.352 34.602,49.352 ; 37.457,50.172 37.75,49.879 37.75,48.425 ; v1(44.65,35.725) 44.85,35.725 44.975,35.85 ; v1(48.1,40.894) 48.197,40.797 49.207,40.797 49.225,40.815 G1.4@49.225,40.875 ; G1.4@49.352,40.882 49.695,41.225 50.682,41.225 ; 49.625,35.425 ccw(c49.7,35.425) 49.7,35.35 R3.1@51.25,35.35 ; v1(51.019,36.35) 51.495,36.35 ; R1.1@51.427,37.522 50.392,37.522 49.775,38.139 49.775,39.048 50.534,39.807 50.879,39.807 51.13,40.058 51.13,40.289 51.42,40.578 C10.2@51.45,40.578 ; R3.1@51.495,35.55 51.495,36.35 ; R1.1@51.495,37.405 51.495,36.35
  Signal Layer 1 w0.5: v1(47.475,44.75) 49.575,44.75 v1(50.475,45.65)
  Signal Layer 2 w0.254: v1(47.248,34.252) 48.624,34.252 49.65,35.277 49.946,35.277 v1(51.019,36.35) ; v1(47.45,43.675) 47.45,44.725 v1(47.475,44.75)
  Signal Layer 2 w0.5: v1(30.6,43.75) 30.6,44.201 30.949,44.549 30.949,45 31,45.051 31,46.375 31.381,46.756 v1(31.381,46.881) ; 30.65,43.4 30.65,42.125 34.075,38.7 35.2,38.7 v1(35.85,39.35) ; v1(44.5,36.95) 46.391,38.841 v1(46.391,39.229)
  Bottom Copper w0.12: C24.2@35.824,39.501 C24.2@35.85,39.475 ; C23.2@35.824,41.299 C23.2@35.85,41.326
  Bottom Copper w0.18: U3.2@46.425,43.187 46.433,43.179 46.712,43.179 46.72,43.187 46.962,43.187 v1(47.45,43.675)
  Bottom Copper w0.2: 43.507,36.801 43.587,36.881 43.709,36.881 43.766,36.938 44.488,36.938 v1(44.5,36.95)
  Bottom Copper w0.254: U3.3@46.366,42.721 46.409,42.721 46.425,42.737 U3.2@46.425,43.15
  Bottom Copper w0.5: 35.824,38.952 C24.2@35.824,39.406 ; C24.2@35.824,39.501 C23.2@35.824,41.299 ; 35.85,38.825 v1(35.85,39.35) ; 35.9,38.875 36.3,38.475 39.025,38.475 39.725,39.175 39.725,40.32 40.364,40.959 40.364,41.492 cw(c41.797,41.241) 40.375,41.55 cw(c40.97,41.421) 40.97,42.03 C26.1@41.945,42.03 ; 39.325,38.719 C11.1@40.663,37.382 ; C11.1@40.95,37.362 40.97,37.382 41.292,37.382 41.739,37.583 C5.2@42.88,37.583 ; R12.1@42.154,33.45 42.35,33.254 43.126,32.478 45.654,32.478 R13.1@45.654,33.254 ; C5.2@42.9,37.541 42.92,37.521 42.92,37.254 43.373,36.801 43.507,36.801 ; v1(44.5,36.95) 44.65,36.8 v1(44.65,35.725) 45.8,34.575 R13.1@45.8,33.4 ; 45.884,32.478 45.884,31.375 U4.8@45.934,31.325 ; v1@46.4,39.225 47.25,39.225 48.1,40.075 v1(48.1,40.894) 48.281,41.075 48.392,41.075 48.996,41.678 48.996,41.855 49.05,41.909 49.05,42.324 48.211,43.163 48.012,43.163 47.5,43.675 v1(47.45,43.675) ; v1(50.475,45.65) 50.475,45.807 50.768,46.1 51.054,46.1 51.127,46.173 51.347,46.173 51.599,46.425 FB3.1@51.775,46.425
VCC1.2V: C16.2 FB1.1 FB2.1 L6.2 U5.12 U5.20 U5.23 U5.28 U5.34 U5.42 | length 45.4
  Top Copper w0.12: v1(34.761,48.52) 34.834,48.447 35.031,48.447 35.342,48.136 35.342,47.908 U5.20@35.35,47.9
  Top Copper w0.14: 32.325,43.175 32.523,43.373 33.102,43.373 U5.34@33.104,43.375 ; U5.23@34.154,47.625 34.154,48.327 34.301,48.474 34.708,48.474 v1@34.747,48.514
  Top Copper w0.18: 33.4,38.1 35.769,40.469 U5.42@35.769,41.669
  Top Copper w0.2: 32.1,45.084 32.1,45.4 32.475,45.775 U5.28@32.9,45.775
  Top Copper w0.254: v1(31.6,42.65) 32.1,43.15 32.3,43.15 32.325,43.175 ; v1(32,38.721) 32,38.654 32.271,38.383 32.271,38.28 32.451,38.1 33.4,38.1 ; U5.12@38.725,47.05 38.737,47.062 38.737,47.573 38.886,47.722 38.901,47.722 39.25,48.071 v1(39.316,48.071)
  Top Copper w0.5: v1(30.025,44.8) 30.105,44.72 v1(31.825,44.72) 31.825,44.809 32.1,45.084
  Signal Layer 2 w0.5: v1(30.025,44.8) 29.825,44.6 29.825,41.475 32,39.3 v1(32,38.721) ; v1(31.825,44.72) 31.825,45.277 33.752,47.204 33.752,47.761 34.241,48.25 34.491,48.25 v1(34.761,48.52)
  Bottom Copper w0.254: C16.2@29.948,42.632 30.707,42.632 31.724,43.649 L6.2@31.975,43.649 ; v1(31.6,42.65) 31.6,43.225 L6.2@31.975,43.6 ; v1(34.761,48.52) 34.775,48.534 34.775,49.825
  Bottom Copper w0.4: 37.673,50.2 37.673,48.708 38.31,48.071 38.52,48.071
  Bottom Copper w0.5: v1(30.025,44.8) 30.325,44.5 30.85,44.5 L6.2@31.15,44.2 ; v1@31.575,42.65 v1(31.6,42.65) 32.349,42.65 32.862,42.137 FB1.1@32.862,40.625 ; 34.775,49.825 35.15,50.2 37.673,50.2 ; 38.52,48.071 v1(39.316,48.071) 40.084,48.071 41.03,47.125 FB2.1@41.05,47.125
VCC_5V: C22.2 C29.2 C30.2 C32.2 D2.5 D3.5 F1.1 J2.A4 J2.A9 J3.22 J3.24 J4.4 J5.A9 R15.1 U2.3 U3.4 | length 117.2
  Top Copper w0.5: v1(27.677,47.261) 27.791,47.375 28.6,47.375 D2.5@28.65,47.425 ; v1(38.379,52.857) 38.506,52.984 C22.2@39.065,52.984 ; C22.2@39.1,53.03 41.981,53.03 C32.2@41.986,53.035
  Signal Layer 2 w0.5: J4.4@24.1,28.6 24.1,29.685 23.807,29.977 23.618,29.977 22.937,30.658 22.937,31.163 22.9,31.2 22.9,42.396 23.193,42.689 23.607,42.689 23.618,42.677 24.582,42.677 25.262,43.358 25.262,43.5 25.9,44.137 25.9,45.5 27.661,47.261 v1(27.677,47.261) 27.677,47.992 29.9,50.216 33.122,50.216 ; v1(33.147,50.851) 33.122,50.825 33.122,50.216 ; v1(38.379,52.857) 38.379,52.781 38.405,52.756 38.405,51.15 ; 44.95,46.325 45.775,45.5 v1@49.025,45.5 ; v1@44.988,46.445 45.1,46.557 v1(45.1,46.6) ; v1@44.988,46.512 42.1,49.4 41.586,49.4 39.836,51.15 38.405,51.15 ; v1(47.895,42.469) 48.1,42.674 48.1,43.225 49.1,44.225 v1@49.1,45.35 ; v1@49.025,45.55 47.75,46.825 47.75,47.875 47.95,48.075 47.95,48.25 49.685,49.985 ; v1@49.1,45.4 v1@49.1,45.35 ; v1(49.784,51.384) 49.685,51.285 49.685,49.985 ; v1(51.7,28.121) 51.746,28.121 53.3,29.675 53.3,35.325 v1(52.325,36.3) ; v1(52.4,42.05) v1@49.1,45.35 ; J3.22@58.5,51.46 58.414,51.374 57.518,51.374 56.442,50.297 55.478,50.297 55.476,50.3 54.317,50.3 53.642,50.975 50.675,50.975 49.685,49.985 ; J3.22@58.5,51.55 J3.24@58.5,54 ; 33.122,50.216 36.27,50.216 36.954,50.9 37.4,50.9 37.65,51.15 38.405,51.15
  Bottom Copper w0.18: U3.4@46.366,42.271 46.374,42.279 46.904,42.279 47.15,42.525
  Bottom Copper w0.22: 30.074,51.206 30.2,51.333 J2.A4@30.2,51.867 ; J2.A4@30.2,52.03 J2.A4@30.2,52.23 ; 33.147,51.181 33.198,51.232 J2.A9@33.198,52.07
  Bottom Copper w0.254: 47.211,42.521 47.776,42.521 47.828,42.469 v1(47.895,42.469) ; v1(49.784,51.384) 49.792,51.392 49.792,52.103 J5.A9@49.8,52.111
  Bottom Copper w0.5: v1(27.677,47.261) 27.677,47.968 27.677,48.086 27.73,48.192 cw(c28.177,47.968) 27.958,48.417 ccw(c27.677,48.997) 28.321,48.997 R15.1@28.321,49.555 ; R15.1@28.321,49.611 28.335,49.963 cw(c29.108,49.933) 28.73,50.607 ; 28.753,50.622 29.611,50.842 ccw(c29.487,51.327) 29.84,50.973 30.074,51.206 ; v1(33.147,50.851) 33.147,51.181 ; v1(45.1,46.6) D3.5@45.1,47.3 ; C29.2@49,44.325 49.045,44.37 49.075,44.4 v1(49.075,45.5) ; C30.2@49.87,25 48.9,25 48.146,25.754 U2.3@48.146,26.574 49.074,26.574 50.621,28.121 v1(51.7,28.121) ; v1(52.325,36.3) 52.325,37.237 52.647,37.559 F1.1@52.97,37.559 52.97,39.319 53.103,39.452 53.103,41.347 v1(52.4,42.05)
  other v1: 49.8,50.6 50.7,51
VCC_A1: C17.2 C18.2 C28.1 FB1.2 U5.44 U5.46 U5.47 | length 22.5
  Top Copper w0.14: U5.44@36.552,41.75 36.556,41.746 36.556,41.41 36.991,40.975 37,40.975 v1@37.008,40.983 ; v1(37.008,40.993) 37.352,41.338 U5.46@37.352,41.925 ; U5.46@37.375,41.925 U5.47@37.754,41.925
  Top Copper w0.254: C18.2@36.625,40.275 36.648,40.252 36.648,38.983 C17.2@36.675,38.956 ; v1@37.008,40.986 38.947,40.986 39.224,40.709 39.224,40.654 39.484,40.394 C28.1@39.484,40.356
  Top Copper w0.4: C18.2@36.69,40.365 36.69,40.648 37.008,40.966 37.008,40.983 37.008,40.986 v1(37.008,40.993)
  Signal Layer 2 w0.5: v1(28.3,40.505) 29.056,39.749 29.056,39.494 29.85,38.7 30.425,38.7 30.875,38.25 31.313,38.25 31.715,37.848 35.634,37.848 36.628,38.843 36.628,40.613 v1(37.008,40.993)
  Bottom Copper w0.5: v1(28.3,40.505) 28.37,40.575 FB1.2@31.125,40.575
VCC_PLL: C19.2 C20.2 FB2.2 U5.7 | length 4.6
  Top Copper w0.14: U5.7@38.804,44.975 38.806,44.977 39.319,44.977 39.892,45.55 ; v1(41.046,45.517) 41.115,45.448 41.353,45.448 41.555,45.245 C20.2@41.625,45.245
  Top Copper w0.254: C20.2@41.64,45.185 42.965,45.185 C19.2@43.025,45.125
  Top Copper w0.3: 39.892,45.55 v1@41.046,45.55
pads on no net: ANT1.2 J2.1 J2.2 J2.3 J2.4 J2.A2 J2.A3 J2.A8 J2.A10 J2.A11 J2.B1 J2.B2 J2.B3 J2.B4 J2.B5 J2.B6 J2.B7 J2.B8 J2.B9 J2.B10 J2.B11 J2.B12 J3.1 J3.2 J3.3 J3.4 J3.5 J3.7 J3.8 J3.9 J3.10 J3.11 J3.13 J3.14 J3.16 J3.17 J3.18 J3.19 J3.21 J3.23 J4.3 J4.5 J4.7 J4.9 J4.10 J4.11 J4.12 J4.13 J4.14 J4.16 J4.18 J4.20 J4.22 J4.23 J4.24 J5.1 J5.2 J5.3 J5.4 J5.A2 J5.A3 J5.A4 J5.A8 J5.A10 J5.A11 J5.B1 J5.B2 J5.B3 J5.B4 J5.B5 J5.B6 J5.B7 J5.B8 J5.B9 J5.B10 J5.B11 J5.B12 U1.1 U1.3 U3.6 U3.8 U3.9 U3.11 U4.7 U5.4 U5.5 U5.6 U5.9 U5.15 U5.21 U5.22 U5.29 U5.30 U5.31 U5.32 U5.35 U5.36 U5.37 U5.38

## Polygon pours and split planes (outlines as drawn)
GND on Signal Layer 1 "GND_L02_P127" (solid, pour order 127): 60,55.5 53.3,55.5 53.3,60 26.7,60 26.7,55.5 20,55.5 20,24.5 25.6,24.5 25.6,37.4 39.7,37.4 39.7,20 55,20 55,24.5 60,24.5 60,32.7
VCC on Signal Layer 1 "VCC_L02_P126" (solid, remove dead copper, pour order 126): 47.1,46.2 50.7,46.2 50.7,44.2 47.1,44.2
GND on Signal Layer 1 "GND_L02_P066" (solid, pour order 66): 35.9,34 24.9,34 24.9,38.1 24.9,38.2 36.1,38.2
GND on Signal Layer 1 "GND_L02_P094" (solid, pour order 94): 46,43 46,40.5 50,40.5 50,43
GND on Signal Layer 1 "GND_L02_P067" (solid, pour order 67): 29.3,22.3 29.3,35.2 29.1,35 25,35 25,25.2 25,24.5 25.5,24.5 25.5,21.8
GND on Signal Layer 1 "GND_L02_P063" (solid, pour order 63): 38.2,20 25.5,20 25.5,22.5 38.2,22.5
GND on Signal Layer 1 "GND_L02_P062" (solid, pour order 62): 40.1,37.9 40.1,20 35.6,20 35.4,20.2 35.4,37.9
GND on Top Copper "GND_L01_P142" (solid, pour order 142): 47.1,44.2 50.7,44.2 50.7,46.1 51,46.4 51,46.6 50.4,46.6 50,46.2 47.1,46.2
GND on Top Copper "GND_L01_P141" (solid, remove dead copper, pour order 141): 51.2,51.3 51.2,46.4 46.8,46.4 46.8,43.9 51.2,43.9 51.2,42.1 52.6,40.7 52.4,40.5 52.4,34.8 50.9,34.8 49.5,36.2 42.4,36.2 42.4,50.9 45,51.3
GND on Top Copper "GND_L01_P125" (solid, remove dead copper, pour order 125): 26.7,54.95 26.7,55.4 26.7,60 53.3,60 53.3,54.95
GND on Top Copper "GND_L01_P124" (solid, remove dead copper, pour order 124): 39.4,32.2 44.4,32.2 47,34.8 47,36.1 47.3,36.4 47.6,36.1 50.4,36.1 50.5,36.2 50.5,40.1 39.4,40.1
GND on Top Copper "GND_L01_P123" (solid, remove dead copper, pour order 123): 46,40.4 46.1,40.5 50,40.5 50,42.4 49.4,43 46,43
GND on Top Copper "GND_L01_P121" (solid, remove dead copper, pour order 121): 51.022,24.6 60,24.6 60,55.5 50.822,55.5
GND on Top Copper "GND_L01_P120" (solid, remove dead copper, pour order 120): 20,55.5 20,52.2 24.6,52.2 25,51.8 25,49.9 28.6,49.9 30,51.3 30,52.2 33.4,52.2 33.4,50.8 55,50.8 55,55.5
GND on Top Copper "GND_L01_P119" (solid, remove dead copper, pour order 119): 25.5,24.6 20,24.6 20,37.6 25.6,37.6
GND on Top Copper "GND_L01_P118" (solid, remove dead copper, pour order 118): 20,42.3 20.1,42.2 26,42.2 29.7,38.5 33.8,38.5 35.8,40.5 35.8,42.3 35.9,42.4 39.5,42.4 39.5,37.5 39.3,37.3 20,37.3
VCC on Top Copper "VCC_L01_P117" (solid, remove dead copper, pour order 117): 30.9,46.7 30.9,47.2 34.2,50.5 37.6,50.5 38,50.1 38,48.4 33.5,48.4 31.8,46.7
VCC on Top Copper "VCC_L01_P116" (solid, remove dead copper, pour order 116): 50.6,41.4 49.5,40.3 49.5,35.2 49.6,35.1 52.1,35.1 52.1,40.5
GND on Top Copper "GND_L01_P115" (solid, remove dead copper, pour order 115): 45,20 45.1,20.1 45.1,23.4 43.5,25 43.5,32.5 39.6,32.5 39.6,20.1
GND on Top Copper "GND_L01_P114" (solid, remove dead copper, pour order 114): 55,20 51.3,20 50.7,20.6 50.7,25.4 50,26.1 50,27.2 51.1,28.3 51.1,30.4 52.6,31.9 52.6,33.4 55,33.4
GND on Top Copper "GND_L01_P106" (solid, pour order 106): 25.5,22.5 25.5,20 35.5,20 35.5,22.5
GND on Top Copper "GND_L01_P057" (solid, pour order 57): 35.5,20 35.5,22.5 25.5,22.5 25.5,20
GND on Top Copper "GND_L01_P056" (solid, pour order 56): 39.6,37.7 39.6,20 35.5,20 35.5,34 29.3,34 29.3,22.4 29.2,22.5 25.5,22.5 25.5,37.7
GND on Bottom Copper "GND_L04_P145" (solid, remove dead copper, pour order 145): 20,24.5 25.4,24.5 25.4,35.3 25.5,35.4 20,35.4
GND on Bottom Copper "GND_L04_P144" (solid, remove dead copper, pour order 144): 39.5,20 55,20 55,24.5 60,24.5 60,55.5 59.9,55.4 53.4,55.4 53.3,55.5 53.3,60 26.7,60 26.7,55.5 20,55.5 20,35.3 39.5,35.3
VCC_5V on Bottom Copper "VCC_5V_L04_P111" (solid, pour order 111): 51.1,50.8 50.2,49.9 49.6,49.9 49.4,50.1 49.4,51.4 49.7,51.7 50.1,51.7 50.1,51.4 51.1,51.4
VCC_5V on Bottom Copper "VCC_5V_L04_P110" (solid, pour order 110): 32.9,51.4 32.2,50.7 32.2,50 32.3,49.9 33.9,49.9 34,50 34,50.7 33.3,51.4
VCC_5V on Bottom Copper "VCC_5V_L04_P073" (solid, pour order 73): 52.07,38.075 52.07,42.266 52.273,42.469 53.365,42.469 53.594,42.24 53.594,38.049
VCC on Bottom Copper "VCC_L04_P072" (solid, pour order 72): 46.076,43.282 46.888,43.282 47.193,43.586 47.193,44.933 47.447,45.187 47.676,45.187 47.981,44.882 47.981,43.739 49.301,42.418 49.301,41.631 48.387,40.716 48.387,39.98 47.295,38.887 46.203,38.887 46.05,39.04 46.05,39.395 46.152,39.497 47.193,39.497 47.676,39.98 47.676,40.818 48.743,41.885 48.743,42.139 47.955,42.926 47.092,42.926 46.787,42.621 46.076,42.621
VCC1.2V on Bottom Copper "VCC1.2V_L04_P070" (solid, pour order 70): 32.182,39.954 32.182,41.427 31.42,42.189 29.667,42.189 29.566,42.291 29.566,44.882 29.921,45.237 29.947,45.212 30.861,45.212 31.648,44.425 33.096,44.425 33.096,41.859 33.426,41.529 33.401,41.504 33.401,39.954
GND on Bottom Copper "GND_L04_P059" (solid, pour order 59): 25.5,20 39.6,20 39.6,37.7 35.5,37.7 35.5,22.4 29.3,22.4 29.3,34 25.5,37.8 25.5,37.7
GND on Bottom Copper "GND_L04_P061" (solid, pour order 61): 26.1,34.2 26.1,34.1 26.1,24.5 25.1,24.5 25.1,24.6 25.1,24.8 25.1,34.2
GND on Bottom Copper "GND_L04_P060" (solid, pour order 60): 35.7,37.8 25.4,37.8 25.1,37.5 25.1,34 37.3,34
GND on Top Mask "GND_L02_P-001" (solid): 50.1,54.5 50.1,55.5 55,55.5 55,21.2 54,21.2 54,54.5
GND on Top Mask "GND_L02_P-001" (solid): 40.4,54.5 40.4,55.5 50.3,55.5 50.3,54.5
GND on Top Mask "GND_L02_P-001" (solid): 36.4,54.5 36.4,55.5 40.4,55.5 40.6,55.3 40.6,54.5
GND on Top Mask "GND_L02_P-001" (solid): 25.1,54.5 25.1,55.5 36.5,55.5 36.5,54.5
GND on Top Mask "GND_L02_P-001" (solid): 25.1,49.9 25.1,55 26.1,55 26.1,49.9
GND on Top Mask "GND_L02_P-001" (solid): 25,42.2 26,42.2 26,38.6 26,38.5 28.5,38.5 28.5,37.7 28.4,37.6 25,37.6
GND on Top Mask "GND_L02_P-001" (solid): 51.4,20 55,20 55,21.2 51.4,21.2
GND on Top Mask "GND_L02_P-001" (solid): 44.3,20 39.4,20 39.4,37.8 40.6,37.8 40.6,21 44.3,21
GND on Signal Layer 2 "GND_L03_P140" (solid, remove dead copper, pour order 140): 35.4,34.1 35.9,34.6 60,34.6 60,24.5 55,24.5 55,20 35.4,20
GND on Signal Layer 2 "GND_L03_P139" (solid, remove dead copper, pour order 139): 53.3,60.1 53.3,49.6 53.2,49.5 26.9,49.5 26.9,55.1 26.7,55.3 26.7,60
GND on Signal Layer 2 "GND_L03_P138" (solid, remove dead copper, pour order 138): 50.9,46.5 46.8,46.5 46.8,49.9 50.9,49.9
GND on Signal Layer 2 "GND_L03_P137" (solid, remove dead copper, pour order 137): 25.5,55.5 25.5,37.5 29,34 59.7,34 59.7,55.5 50.9,55.5 50.9,44 46.9,44 46.9,55.5
GND on Signal Layer 2 "GND_L03_P136" (solid, remove dead copper, pour order 136): 25.6,24.5 20,24.5 20,55.5 26.7,55.5 25.6,54.4
VCC_5V on Signal Layer 2 "VCC_5V_L03_P135" (solid, remove dead copper, pour order 135): 46.9,44.3 46.8,44.2 46,44.2 39.9,50.3 37.2,50.3 36.6,49.7 30.1,49.7 28.2,47.8 28.2,47.1 26.4,45.3 26.4,43.7 25.1,42.4 25.1,28.5 24.5,27.9 23.7,27.9 22.7,28.9 22.7,44.7 29.4,51.4 35.9,51.4 37.6,53.1 40.7,53.1 44.3,49.5 46.9,49.5
GND on Signal Layer 2 "GND_L03_P130" (solid, remove dead copper, pour order 130): 39.5,20 25.5,20 25.5,24.5 25.5,37.6 29.3,37.6 29.3,22.5 39.5,22.5
VCC_5V on Signal Layer 2 "VCC_5V_L03_P134" (solid, remove dead copper, pour order 134): 47.9,43.9 51.7,43.9 53.4,42.2 53.4,41.2 53.2,41 51.6,41 50.6,42 47.3,42 47.1,42.2 47.1,43.4
VCC_5V on Signal Layer 2 "VCC_5V_L03_P133" (solid, remove dead copper, pour order 133): 60,55.5 60,50.1 50.7,50.1 48.9,48.3 49,48.2 49,46.5 46.8,46.5 46.8,49.5 49.6,52.3 54.5,52.3 54.5,55.4 54.4,55.5
VCC1.2V on Signal Layer 2 "VCC1.2V_L03_P083" (solid, pour order 83): 31.801,44.475 32.207,44.475 35.281,47.549 35.281,48.463 34.976,48.768 34.061,48.768 31.75,46.457 31.75,45.314
VCC on Signal Layer 2 "VCC_L03_P082" (solid, pour order 82): 36.119,39.548 36.119,39.268 35.331,38.481 33.96,38.481 30.353,42.088 30.353,44.374 30.632,44.653 30.632,46.66 31.191,47.219 31.699,47.219 31.877,47.041 31.877,46.076 31.496,45.695 31.496,44.272 35.89,39.878 35.89,39.827
VCC1.2V on Signal Layer 2 "VCC1.2V_L03_P081" (solid, pour order 81): 30.074,45.263 28.981,44.171 28.981,41.173 31.75,38.405 32.36,38.405 32.69,38.735 32.69,39.624 30.226,42.088 30.226,45.263
VCC_A1 on Signal Layer 2 "VCC_A1_L03_P080" (solid, pour order 80): 27.407,41.021 28.88,41.021 31.775,38.125 31.775,38.075 35.458,38.075 35.484,38.049 36.373,38.938 36.373,40.665 36.957,41.25 38.278,41.25 38.557,40.97 38.557,37.871 37.16,36.474 29.032,36.474 29.032,36.5 27.407,38.125
VCC on Signal Layer 2 "VCC_L03_P078" (solid, pour order 78): 44.247,36.601 45.364,36.601 47.346,38.583 47.346,39.167 46.863,39.167 46.558,39.472 45.974,39.472 44.12,37.617 44.12,36.754
VCC on Signal Layer 2 "VCC_L03_P077" (solid, pour order 77): 46.66,34.417 47.066,34.823 48.692,34.823 50.47,36.601 51.181,36.601 51.41,36.373 51.41,35.865 49.327,33.782 46.888,33.782 46.736,33.934 46.66,33.934
VCC_5V on Signal Layer 2 "VCC_5V_L03_P076" (solid, pour order 76): 51.841,36.678 52.502,36.678 53.848,35.331 53.848,29.413 51.968,27.534 51.156,27.534 50.825,27.864 50.825,28.499 52.426,30.099 52.426,35.027 51.613,35.839 51.613,36.424

## Keep-outs
Keep-Out Layer:
  the board outline again, w0.254

## Silkscreen, mask and mechanical layers (free items; w line width, h text height)
Top Overlay:
  circle w0.254: c57.7,22.3 r2.003
  circle w0.254: c22.3,22.3 r2
  circle w0.254: c57.7,57.7 r2
  circle w0.254: c22.3,57.7 r2
  lines w0.254: 29.25,22.45 35.5,22.45 35.5,34.05 29.25,34.05 29.25,22.475
Bottom Overlay:
  drawing of 2 lines, arcs and shapes, not listed
Mechanical 1:
  the board outline again, w0.254

## Text inside footprints (layer, text, board x,y; h text height)
J1: Mechanical 13 "PCB EDGE" at 52.179,20.198 h0.61